# Altium PCB PCB1.PcbDoc
Units mm, origin at the board's own origin, x right, y up, seen from the top; angles counter-clockwise.
Board outline 118.49 x 70.48 mm, 2 copper layers (Top Layer, Bottom Layer); 58 components, 45 nets, 185 pads, 12 vias.
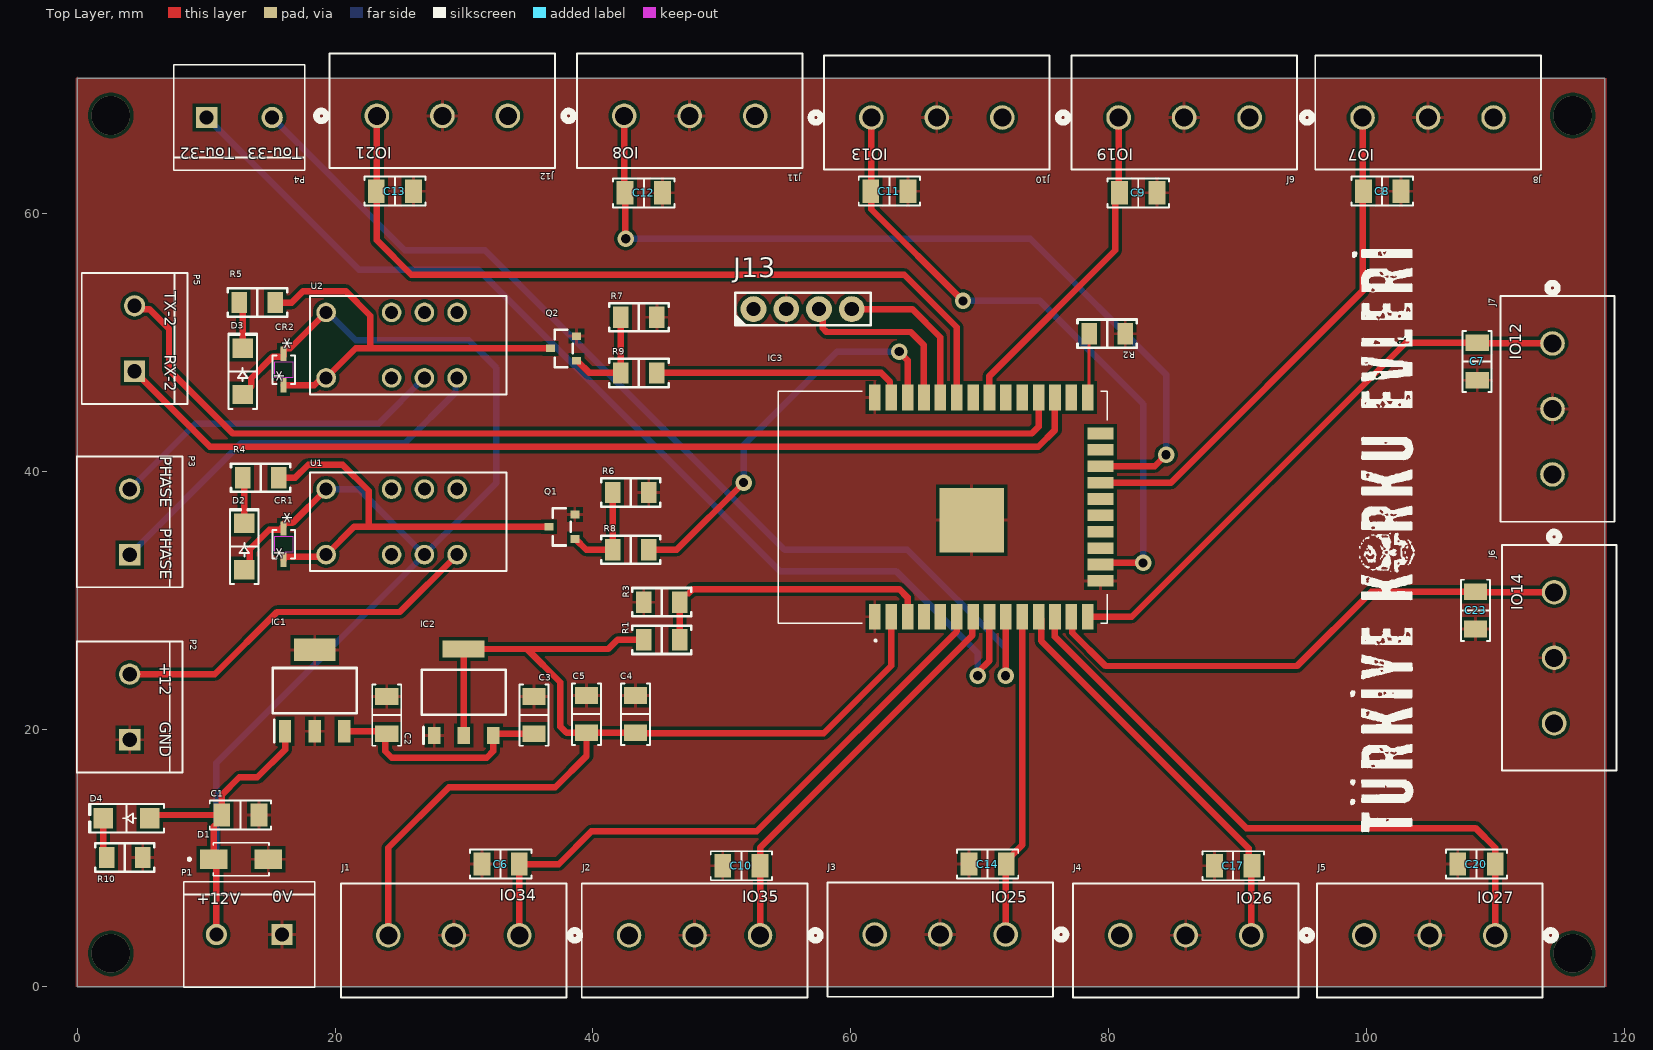
[diagram p0: Top Layer view]
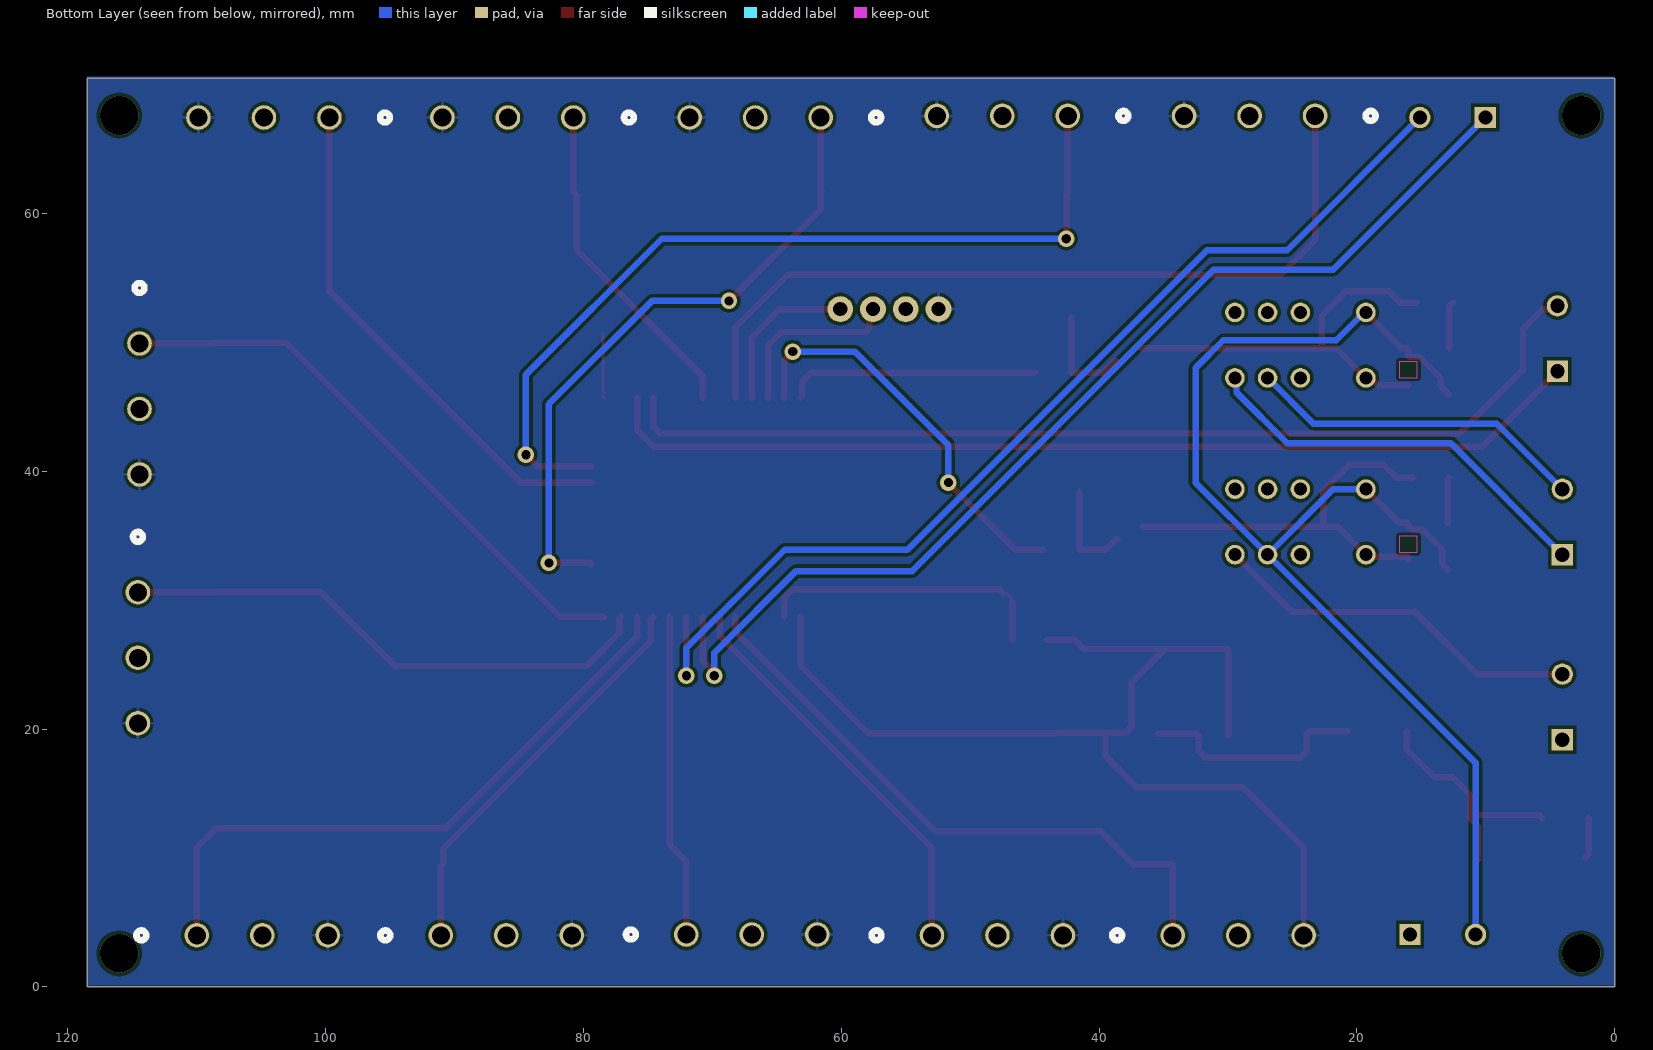
[diagram p1: Bottom Layer view, seen from below]
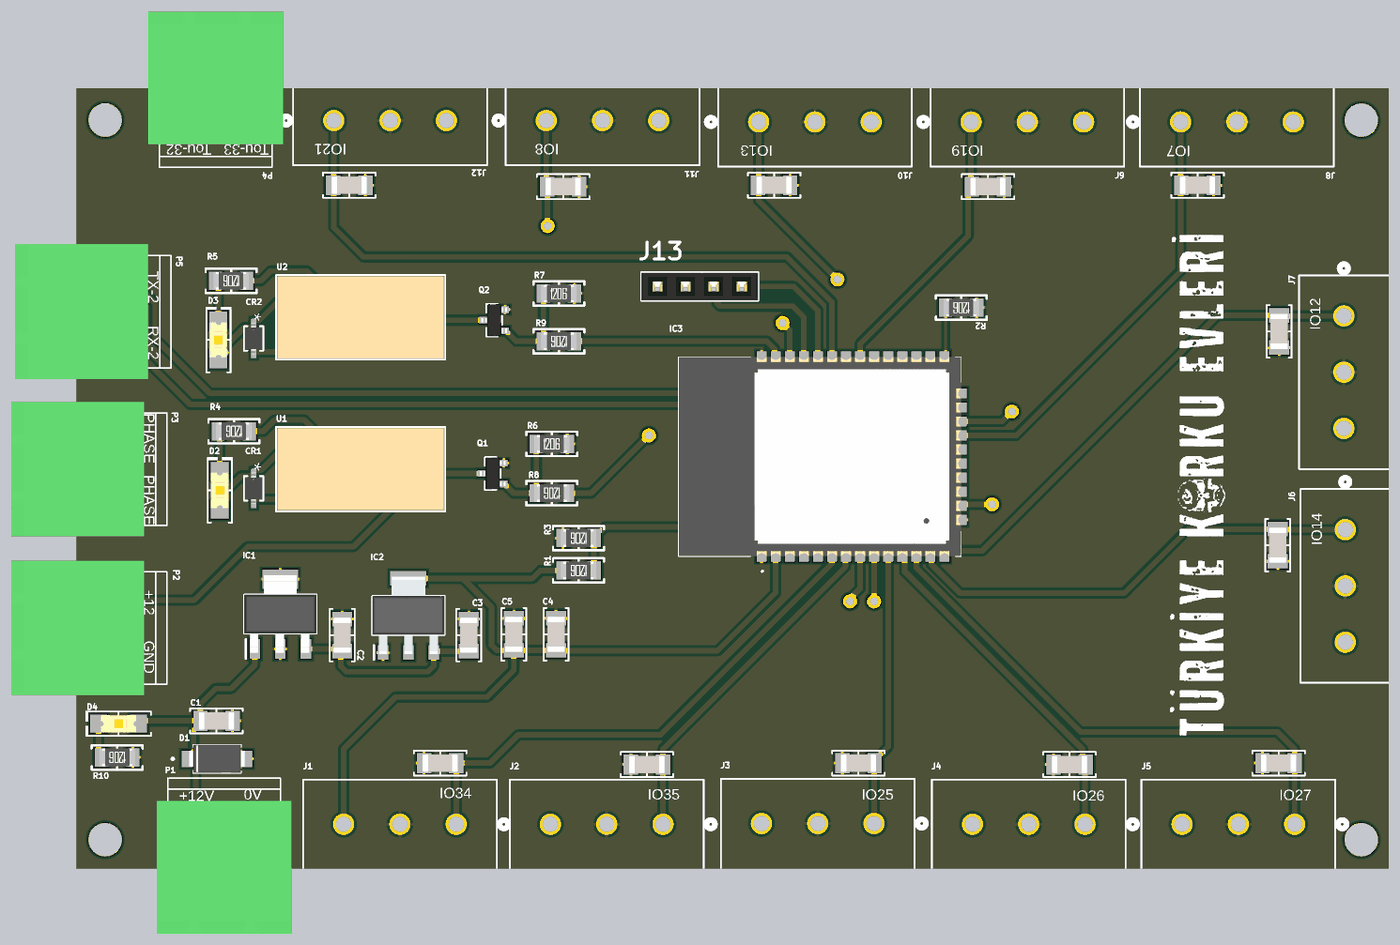
[diagram p2: 3D render of the assembled board from above, using the file's embedded part models]

## Layer stack, top to bottom
Top Solder: solder mask 0.0102, Solder Resist, Dk 3.5
Top Layer: signal copper 0.0356
Dielectric 1: dielectric 0.32, FR-4, Dk 4.8
Bottom Layer: signal copper 0.0356
Bottom Solder: solder mask 0.0102, Solder Resist, Dk 3.5

## Board outline
0,0 118.491,0 118.491,70.485 0,70.485

## Design rules (kind name [scope] priority, off if disabled: settings)
Clearance [All] p1: gap=0.254 ignorepadtopadclearanceinfootprint=FALSE except(0: Arc-Hole Track-Hole SMDPad-Hole THPad-Hole Via-Hole Fill-Hole Poly-Hole Region-Hole Text-Hole)
PolygonConnect [All] p1: connectstyle=Relief reliefconductorwidth=0.254 reliefentries=4 polygonreliefangle="90 Angle" airgapwidth=0.254
RoutingVias [All] p1: holewidth=0.711 width=1.27 viastyle="Through Hole" minholewidth=0.711 minwidth=1.27 maxholewidth=0.711 maxwidth=1.27
SolderMaskExpansion [All] p1: expansion=0.102 istentingtop=FALSE
Width [All] p1: maxlimit=0.254 minlimit=0.254 preferedwidth=0.254
30 further rules are at their usual default settings.

## Classes and differential pairs
component class relay: CR1 CR2 D2 D3 P2 P3 Q1 Q2 R4 R5 R6 R7 R8 R9 U1 U2
component class power: C1 C2 C3 D1 D4 IC1 IC2 P1 R10
component class microprocessor: C4 C5 IC3 J13 R1 R2 R3
component class connector: C6 C7 C8 C9 C10 C11 C12 C13 C14 C17 C20 C23 J1 J2 J3 J4 J5 J6 J7 J8 J9 J10 J11 J12 P4 P5

## Components (designator, comment, footprint, x,y, rotation, side; value= is the part's Value field where it differs from the comment)
C1 "100nF" "CAP 1206_3216 - 0.8MM" 12.647,13.335 r0 top value=1000pF
C2 "100nF" "CAP 1206_3216 - 0.8MM" 24.003,21.082 r270 top value=1000pF
C3 "100nF" "CAP 1206_3216 - 0.8MM" 35.433,21.082 r270 top value=1000pF
C4 "10uf" "CAP 1206_3216 - 0.8MM" 43.307,21.156 r270 top value=1000pF
C5 "100nf" "CAP 1206_3216 - 0.8MM" 39.497,21.156 r270 top value=1000pF
C6 "100nf" "CAP 1206_3216 - 0.8MM" 32.84,9.525 r0 top value=1000pF
C7 "100nf" "CAP 1206_3216 - 0.8MM" 108.585,48.514 r90 top value=1000pF
C8 "100nf" "CAP 1206_3216 - 0.8MM" 101.219,61.722 r180 top value=1000pF
C9 "100nf" "CAP 1206_3216 - 0.8MM" 82.296,61.595 r180 top value=1000pF
C10 "100nf" "CAP 1206_3216 - 0.8MM" 51.509,9.398 r0 top value=1000pF
C11 "100nf" "CAP 1206_3216 - 0.8MM" 62.992,61.722 r180 top value=1000pF
C12 "100nf" "CAP 1206_3216 - 0.8MM" 43.942,61.595 r180 top value=1000pF
C13 "100nf" "CAP 1206_3216 - 0.8MM" 24.638,61.722 r180 top value=1000pF
C14 "100nf" "CAP 1206_3216 - 0.8MM" 70.612,9.525 r0 top value=1000pF
C17 "100nf" "CAP 1206_3216 - 0.8MM" 89.662,9.398 r0 top value=1000pF
C20 "100nf" "CAP 1206_3216 - 0.8MM" 108.532,9.525 r0 top value=1000pF
C23 "100nf" "CAP 1206_3216 - 0.8MM" 108.458,29.21 r90 top value=1000pF
CR1 "1N4148WS-E3-08" CR_WS-E3-08_VIS 16.002,34.341 r270 top
CR2 "1N4148WS-E3-08" CR_WS-E3-08_VIS 16.002,47.879 r270 top
D1 "SS120" DIOM4325X250N 12.7,9.906 r0 top
D2 "1206" "LED 1206_3216 YELLOW" 12.954,34.163 r90 top value=Yellow
D3 "1206" "LED 1206_3216 YELLOW" 12.827,47.752 r90 top value=Yellow
D4 "1206" "LED 1206_3216 YELLOW" 3.81,13.081 r180 top value=Yellow
IC1 "LM7805MPX_NOPB" SOT230P700X180-4N 18.415,22.987 r90 top
IC2 "AMS1117-3.3" SOT229P700X180-4N 29.972,22.86 r90 top
IC3 "ESP-WROOM-32D" ESPWROOM32D 67.125,37.211 r90 top
J1 "1924318" CONN_1924318 24.13,4 r180 top
J2 "1924318" CONN_1924318 42.799,4 r180 top
J3 "1924318" CONN_1924318 61.849,4.064 r180 top
J4 "1924318" CONN_1924318 80.899,4 r180 top
J5 "1924318" CONN_1924318 99.822,4 r180 top
J6 "1924318" CONN_1924318 114.554,20.447 r270 top
J7 "1924318" CONN_1924318 114.427,39.751 r270 top
J8 "1924318" CONN_1924318 109.855,67.437 r0 top
J9 "1924318" CONN_1924318 90.932,67.437 r0 top
J10 "1924318" CONN_1924318 71.755,67.437 r0 top
J11 "1924318" CONN_1924318 52.578,67.564 r0 top
J12 "1924318" CONN_1924318 33.401,67.564 r0 top
J13 "M20-7820442" "HARWIN M20-7820445" 56.261,52.578 r90 top
P1 "282837-2" TE_282837-2 13.335,4.064 r180 top
P2 "282837-2" TE_282837-2 4.064,21.717 r90 top
P3 "282837-2" TE_282837-2 4.064,36.068 r90 top
P4 "282837-2" TE_282837-2 12.573,67.437 r0 top
P5 "282837-2" TE_282837-2 4.445,50.292 r90 top
Q1 "BC817-25,215" "NEXPERIA SOT-23-3" 37.592,35.687 r180 top
Q2 "BC817-25,215" "NEXPERIA SOT-23-3" 37.719,49.53 r180 top
R1 "4.7K" "RES 1206_3216" 45.336,26.924 r180 top value="61.9 kOhms"
R2 "4.7K" "RES 1206_3216" 79.883,50.673 r180 top value="61.9 kOhms"
R3 "4.7K" "RES 1206_3216" 45.336,29.845 r180 top value="61.9 kOhms"
R4 "4.7K" "RES 1206_3216" 14.224,39.497 r180 top value="61.9 kOhms"
R5 "4.7K" "RES 1206_3216" 13.97,53.086 r180 top value="61.9 kOhms"
R6 "10K" "RES 1206_3216" 42.926,38.354 r0 top value="61.9 kOhms"
R7 "10K" "RES 1206_3216" 43.564,51.943 r0 top value="61.9 kOhms"
R8 "4.7K" "RES 1206_3216" 42.926,33.909 r180 top value="61.9 kOhms"
R9 "4.7K" "RES 1206_3216" 43.564,47.625 r180 top value="61.9 kOhms"
R10 "4.7K" "RES 1206_3216" 3.683,10.033 r180 top value="61.9 kOhms"
U1 "TX2-L-12V" RELAY_TX2_PAN 19.304,33.528 r90 top
U2 "TX2-L-12V" RELAY_TX2_PAN 19.304,47.244 r90 top

## Footprints (in the part's own frame and the unit in brackets; to place one, negate y for a bottom-side part, rotate by r counter-clockwise, add the part's x,y. Pads: shape width x height; smd on the part's side, far side on the other; paste and mask are expansions set on the pad)
"CAP 1206_3216 - 0.8MM" [mm] "Chip Capacitor, 2-Leads, Body 3.25x1.60mm, IPC Medium Density"
  rect 1.3x1.8 smd: 1(-1.45,0) 2(1.45,0)
  silkscreen extent -2.37,-1.12 2.37,1.12, body extent -1.6,-0.8 1.6,0.8, height 0.8
CONN_1924318 [mil]
  round 75 / inner round 60 / far side round 75 hole 55 paste-37.5 mask+0: 1(-400,0) 2(-200,0) 3(0,0)
  silkscreen extent -584,-159 145,190, body extent -540,-85 139,387, height 336
CR_WS-E3-08_VIS [mil]
  rect 44x18 smd paste+0 mask+0: 1(-48,0) 2(48,0)
  Keep-Out Layer region: -24,-27.5 -24,27.5 24,27.5 24,-27.5
  silkscreen extent -44,-35 44,35, body extent -56,-29 56,29, height 45
DIOM4325X250N [mm]
  rect 2.12x1.5 smd: A(2.115,0) C(-2.115,0)
  silkscreen extent -4.1,-1.28 2.16,1.28, body extent -2.57,-1.28 2.57,1.28, height 2.5
ESPWROOM32D [mm]
  rect 2x0.9 smd: 1(-8.5,5.26) 2(-8.5,3.99) 3(-8.5,2.72) 4(-8.5,1.45) 5(-8.5,0.18) 6(-8.5,-1.09) 7(-8.5,-2.36) 8(-8.5,-3.63) 9(-8.5,-4.9) 10(-8.5,-6.17) 11(-8.5,-7.44) 12(-8.5,-8.71) 13(-8.5,-9.98) 14(-8.5,-11.25) 25(8.5,-11.25) 26(8.5,-9.98) 27(8.5,-8.71) 28(8.5,-7.44) 29(8.5,-6.17) 30(8.5,-4.9) 31(8.5,-3.63) 32(8.5,-2.36) 33(8.5,-1.09) 34(8.5,0.18) 35(8.5,1.45) 36(8.5,2.72) 37(8.5,3.99) 38(8.5,5.26)
  rect 0.9x2 smd: 15(-5.715,-12.25) 16(-4.445,-12.25) 17(-3.175,-12.25) 18(-1.905,-12.25) 19(-0.635,-12.25) 20(0.635,-12.25) 21(1.905,-12.25) 22(3.175,-12.25) 23(4.445,-12.25) 24(5.715,-12.25)
  rect 5x5 smd: 39(-1,-2.24)
  silkscreen extent -10.4,-12.75 9,12.75, body extent -9,-12.75 9,12.75, height 3.1
"HARWIN M20-7820445" [mm] "2.54mm DIL PC TAIL PIN HEADER ASSEMBLY"
  round 2 hole 1.1: 1(0,3.81) 2(0,1.27) 3(0,-1.27) 4(0,-3.81)
  silkscreen extent -1.27,-5.3 1.27,5.27, body extent -1.25,-5.28 1.25,5.28, height 8.5
"LED 1206_3216 YELLOW" [mm] "Chip Diode, 2-Leads, Body 3.13x1.55mm, IPC Medium Density"
  rect 1.5x1.6 smd: 1(-1.8,0) 2(1.8,0)
  silkscreen extent -2.92,-1.1 2.92,1.1, body extent -1.6,-0.8 1.6,0.8, height 0.9
"NEXPERIA SOT-23-3" [mm] "SOT23, 3-Leads, Body 2.90x2.40mm, Pitch 0.95mm, IPC Medium Density"
  rect 0.7x0.6 smd: 1(-1,0.95) 2(-1,-0.95) 3(1,0)
  silkscreen extent -0.7,-1.45 0.7,1.45, body extent -1.16,-1.45 1.16,1.45, height 1.5
RELAY_TX2_PAN [mil]
  round 60 hole 40 paste-30 mask+0: 1(0,0) 3(0,-200) 4(0,-300) 5(0,-400) 8(200,-400) 9(200,-300) 10(200,-200) 12(200,0)
  silkscreen extent -50,-551 251,50, body extent -46,-546 246,45, height 323
"RES 1206_3216" [mm] "Chip Resistor, 2-Leads, Body 3.13x1.55mm, IPC Medium Density"
  rect 1.2x1.65 smd: 1(-1.4,0) 2(1.4,0)
  silkscreen extent -2.3,-1.1 2.3,1.1, body extent -1.6,-0.8 1.6,0.8, height 0.6
SOT229P700X180-4N [mm]
  rect 1.3x0.95 smd: 1(-3.35,2.29) 2(-3.35,0) 3(-3.35,-2.29)
  rect 1.3x3.25 smd: 4(3.35,0)
  silkscreen extent -4,-3.25 1.75,3.25, body extent -3.5,-3.25 3.5,3.25, height 1.8
SOT230P700X180-4N [mm]
  rect 1.75x0.95 smd: 1(-3.15,2.3) 2(-3.15,0) 3(-3.15,-2.3)
  rect 1.75x3.2 smd: 4(3.15,0)
  silkscreen extent -4.03,-3.25 1.75,3.25, body extent -3.5,-3.25 3.5,3.25, height 1.68
TE_282837-2 [mm]
  rect 1.65x1.65 / inner round 1.65 / far side rect 1.65x1.65 hole 1.1: 1(-2.54,0)
  round 1.65 hole 1.1: 2(2.54,0)
  silkscreen extent -5.08,-4.1 5.08,4.1, body extent -6.08,-2.03 6.08,9.97, height 8.45

## Part data
C1 C2 C3 C4 C5 C6 C7 C8 C9 C10 C11 C12 C13 C14 C17 C20 C23: library part MM062C102KCZ2A, "CAP CER 1000PF 200V X7R 1206", Capacitance=1000pF, Device Package="1206 (3216 Metric)", manufacturer="AVX Corporation", Operating Temperature="-55°C ~ 125°C", Supplier Part Number 1=478-10625-1-ND, Temperature Coefficient=X7R, Tolerance=±10%, Voltage - Rated=200V, Applications="Medical, Non-Critical", componentlink1description=Datasheet, componentlink1url=http://datasheets.avx.com/AVX-MM.pdf, componentlink2description="DigiKey Link", componentlink2url=http://digikey.com/product-detail/en/avx-corporation/MM062C102KCZ2A/478-10625-1-ND/7344886, lastupdated="2.09.2020 01:04:46", Lifecycle Status=Active, Minimum Order=1, Mounting Type="Surface Mount, MLCC", Package / Case="1206 (3216 Metric)", packaging=TapeAndReel, Part Number=MM062C102KCZ2A, Part Status=Active, partid=18686, price=0.57, series=MM, Size / Dimension="0.126\" L x 0.063\" W (3.20mm x 1.60mm)", Supplier 1=DigiKey, Thickness (Max)="0.029\" (0.74mm)"
CR1 CR2: "No Description Available", Mfr_Name=Vishay
D1: "1A, 200V, Schottky Rectifier", Package="SMA-2 Taiwan Semiconductor", Availability="In Stock", Check_prices=https://www.snapeda.com/parts/SS120/Taiwan+Semiconductor/view-part/?ref=eda, MF="Taiwan Semiconductor", MP=SS120, price=None, SnapEDA_Link=https://www.snapeda.com/parts/SS120/Taiwan+Semiconductor/view-part/?ref=snap
D2 D3 D4: library part 25-21UYC/S530-A2/TR8, "LED YELLOW CLEAR 2SMD", Color=Yellow, Current - Test=20mA, Device Package="1206 (3216 Metric)", Lens Color=Colorless, manufacturer="Everlight Electronics Co Ltd", Millicandela Rating=45mcd, Supplier Device Package=2-SMD, Supplier Part Number 1=1080-1595-1-ND, Voltage - Forward (Vf) (Typ)=2V, componentlink1description=Datasheet, componentlink1url=//media.digikey.com/pdf/Data%20Sheets/Everlight%20PDFs/25-21UYC-S530-A2-TR8_V6_11-12-18.pdf, componentlink2description="DigiKey Link", componentlink2url=https://www.digikey.com/en/products/detail/everlight-electronics-co-ltd/25-21UYC-S530-A2-TR8/8535289, Configuration=Standard, Height (Max)=1.20mm, lastupdated="3.06.2024 20:01:38", Lens Size="1.10mm Dia", Lens Style="Round with Domed Top", Lens Transparency=Clear, Lifecycle Status=Active, Minimum Order=1, Mounting Type="Surface Mount", Package / Case="1206 (3216 Metric)", packaging=TapeAndReel, Part Number=25-21UYC/S530-A2/TR8, Part Status=Active, partid=2, price=0.08, series=-, Size / Dimension="3.20mm L x 1.60mm W", Supplier 1=DigiKey, Viewing Angle=60°, Wavelength - Dominant=589nm, Wavelength - Peak=591nm
IC1: "Integrated Circuit", Arrow Part Number=LM7805MPX/NOPB, Manufacturer_Name="Texas Instruments", Mouser Part Number=595-LM7805MPX/NOPB, Arrow Price/Stock=https://www.arrow.com/en/products/lm7805mpxnopb/texas-instruments?utm_currency=USD&region=nac, Datasheet Link=https://www.arrow.com/en/products/lm7805mpxnopb/texas-instruments, Height=1.8mm, Manufacturer_Part_Number=LM7805MPX/NOPB, Mouser Price/Stock=https://www.mouser.co.uk/ProductDetail/Texas-Instruments/LM7805MPX-NOPB?qs=gO6GG99qvRCSwIVAoVKHPw%3D%3D
IC2: "Integrated Circuit", Manufacturer_Name=Advanced, Datasheet Link=https://datasheet.datasheetarchive.com/originals/distributors/Datasheets-28/DSA-550594.pdf, Height=1.8mm, Manufacturer_Part_Number=AMS1117-3.3
IC3: "Integrated Circuit", Manufacturer_Name="Espressif Systems", Mouser Part Number=356-ESP-WROOM-32D, Datasheet Link=https://componentsearchengine.com/Datasheets/1/ESP-WROOM-32D.pdf, Height=3.2mm, Manufacturer_Part_Number=ESP-WROOM-32D, Mouser Price/Stock=https://www.mouser.co.uk/ProductDetail/Espressif-Systems/ESP-WROOM-32D?qs=MLItCLRbWsyWVKgdQMcFuQ%3D%3D
J1 J2 J3 J4 J5 J6 J7 J8 J9 J10 J11 J12: "No Description Available", Mfr_Name="Phoenix Contact", RefDes=RefDes, Type=Type
J13: "CONN RCPT 4POS 0.1 GOLD PCB", Current Rating (Amps)=3A, manufacturer="Harwin Inc.", Material Flammability Rating="UL94 V-0", Operating Temperature="-40°C ~ 105°C", Supplier Part Number 1=952-1791-ND, Insulation Color=Black, componentlink1description=Datasheet, componentlink1url=https://cdn.harwin.com/pdfs/Harwin_PC_Connectors_M20.pdf, componentlink2description="DigiKey Link", componentlink2url=https://www.digikey.com/en/products/detail/harwin-inc/M20-7820442/3727760, Connector Type=Receptacle, Contact Finish - Mating=Gold, Contact Finish - Post=Tin, Contact Finish Thickness - Mating=Flash, Contact Length - Post="0.118\" (3.00mm)", Contact Type="Female Socket", Fastening Type=Push-Pull, lastupdated="21.09.2022 18:57:11", Lifecycle Status=Active, Mated Stacking Heights="11.04mm, 12.63mm", Minimum Order=1, Mounting Type="Through Hole", Number of Positions=4, Number of Positions Loaded=All, Number of Rows=1, packaging=Tube, Part Number=M20-7820442, Part Status=Active, Pitch - Mating="0.100\" (2.54mm)", price=0.45, series=M20, Style="Board to Board or Cable", Supplier 1=DigiKey, Termination=Solder, Insulation Height="0.335\" (8.51mm)"
P1 P2 P3 P4 P5: "Ð Ð°Ð·ÑŠÐµÐ¼Ð½Ñ‹Ðµ ÐºÐ»ÐµÐ¼Ð¼Ð½Ñ‹Ðµ ÐºÐ¾Ð»Ð¾Ð´ÐºÐ¸ Ð Ð¾Ð·ÐµÑ‚ÐºÐ° 2 Ð¿Ð¾Ð»Ð¾Ð¶ÐµÐ½Ð¸Ñ 5,08 Ð¼Ð¼ ÐŸÑ€Ð¸Ð¿Ð¾Ð¹ Ð¿Ñ€ÑÐ¼Ð¾Ð¹ Ñ‡ÐµÑ€ÐµÐ· Ð¾Ñ‚Ð²ÐµÑ€ÑÑ‚Ð¸Ðµ 13,5 Ð / ÐºÐ¾Ð½Ñ‚Ð°ÐºÑ‚", Package=None, Availability="In Stock", Check_prices=https://www.snapeda.com/parts/282837-2/TE+Connectivity+AMP+Connectors/view-part/?ref=eda, MF="TE Connectivity", MP=282837-2, price=None, Purchase-URL=https://pricing.snapeda.com/search/part/282837-2/?ref=eda, SnapEDA_Link=https://www.snapeda.com/parts/282837-2/TE+Connectivity+AMP+Connectors/view-part/?ref=snap
Q1 Q2: "TRANS NPN 45V 0.5A TO236AB", Current - Collector (Ic) (Max)="500 mA", Current - Collector Cutoff (Max)="100nA (ICBO)", DC Current Gain (hFE) (Min) @ Ic, Vce="160 @ 100mA, 1V", Frequency - Transition=100MHz, manufacturer="Nexperia USA Inc.", Operating Temperature="150°C (TJ)", Package / Case="TO-236-3, SC-59, SOT-23-3", Power - Max="250 mW", Supplier Device Package=TO-236AB, Supplier Part Number 1=1727-2918-1-ND, Voltage - Collector Emitter Breakdown (Max)="45 V", componentlink1description=Datasheet, componentlink1url=https://assets.nexperia.com/documents/data-sheet/BC817_SER.pdf, componentlink2description="DigiKey Link", componentlink2url=https://www.digikey.com/en/products/detail/nexperia-usa-inc/BC817-25-215/763234, lastupdated="3.06.2024 20:24:20", Lifecycle Status=Active, Minimum Order=1, Mounting Type="Surface Mount", packaging=TapeAndReel, Part Number=BC817-25,215, Part Status=Active, partid=319, price=0.02, series=-, Supplier 1=DigiKey, Transistor Type=NPN, Vce Saturation (Max) @ Ib, Ic="700mV @ 50mA, 500mA"
R1 R2 R3 R4 R5 R6 R7 R8 R9 R10: library part CRCW120661K9FKEA, "RES SMD 61.9K OHM 1% 1/4W 1206", Device Package="1206 (3216 Metric)", manufacturer="Vishay Dale", Operating Temperature="-55°C ~ 155°C", Power (Watts)="0.25W, 1/4W", Ratings=AEC-Q200, Resistance="61.9 kOhms", Supplier Device Package=1206, Supplier Part Number 1=541-61.9KFCT-ND, Temperature Coefficient=±100ppm/°C, Tolerance=±1%, componentlink1description=Datasheet, componentlink1url=http://www.vishay.com/docs/20035/dcrcwe3.pdf, componentlink2description="DigiKey Link", componentlink2url=https://www.digikey.com/en/products/detail/vishay-dale/CRCW120661K9FKEA/1176848, Composition="Thick Film", Features="Automotive AEC-Q200", Height - Seated (Max)="0.024\" (0.60mm)", lastupdated="9.02.2024 20:54:45", Lifecycle Status=Active, Minimum Order=1, Number of Terminations=2, Package / Case="1206 (3216 Metric)", packaging=TapeAndReel, Part Number=CRCW120661K9FKEA, Part Status=Active, partid=26923, price=0.01, series=CRCW, Size / Dimension="0.126\" L x 0.063\" W (3.20mm x 1.60mm)", Supplier 1=DigiKey
U1 U2: "No Description Available", Mfr_Name=Panasonic, Digi-Key_Part_Number_1=TX2-L-12V-ND, RefDes=RefDes, Type=Type

## Via types
v1: diameter 1.27, hole 0.711, Top Layer to Bottom Layer, 8 vias
v2: diameter 3, hole 3, Top Layer to Bottom Layer, 4 vias

## Nets (pads, with @x,y where several pads share a name; then routed paths per layer and width w, separated by ;. In a path a pad name is that pad's centre, name@x,y a point inside that pad or via, vN(x,y) a via of type N, cw(c..) or ccw(c..) an arc to the next point about the centre after c; other vN are vias at no path point)
3.3V: C4.2 C5.2 IC2.2 IC2.4 IC3.2 J1.3 J2.3 J3.3 J4.3 J5.3 J6.3 J7.3 J8.3 J9.3 J10.3 J11.3 J12.3 J13.1 R1.2 | length 86.8
  Top Layer w0.254: C5.2@39.247,19.706 C5.2 ; C4.2 C4.2@43.331,19.682 ; 57.909,19.682 57.933,19.706
  Top Layer w0.5: J1.3 24.13,10.795 28.829,15.494 37.084,15.494 39.497,17.907 C5.2 C4.2@43.18,19.706 ; IC2.2 IC2.4 34.877,26.21 ; C5.2@39.247,19.706 37.952,19.706 37.465,20.193 37.465,23.622 34.877,26.21 ; C4.2@43.331,19.682 57.909,19.682 ; R1.2@44.066,26.924 41.91,26.924 41.196,26.21 34.877,26.21 ; 57.933,19.706 63.135,24.908 IC3.2
5V: C2.2 C3.2 IC1.3 IC2.3 | length 17.8
  Top Layer w0.5: IC1.3 23.671,19.837 23.876,19.632 23.876,18.288 24.384,17.78 31.75,17.78 32.262,18.292 IC2.3 32.384,19.632 C3.2
+12: C1.1 CR1.1 CR2.1 D1.C D2.1 D3.1 D4.1 IC1.1 P1.2 U1.4 U1.12 U2.12 | length 121.8
  Top Layer w0.5: D4.1 5.864,13.335 C1.1 ; P1.2 10.795,9.696 D1.C 10.585,12.473 11.197,13.085 C1.1 ; D3.1 12.877,45.952 13.5,46.575 13.5,47.224 15.146,48.87 15.9,48.87 16.002,48.971 CR2.1 16.002,49.428 16.104,49.53 16.51,49.53 U2.12 ; D2.1 13.371,32.78 13.371,33.945 14.88,35.454 15.709,35.454 16.002,35.747 16.002,35.89 16.104,35.992 16.688,35.992 U1.12 ; IC1.1 16.115,18.401 13.97,16.256 12.573,16.256 11.197,14.88 C1.1
  Bottom Layer w0.254: U2.12 U2.12@19.431,52.324
  Bottom Layer w0.5: P1.2 10.795,17.399 U1.4 ; U1.12 21.844,38.608 U1.4 ; U2.12@19.431,52.324 21.59,50.165 30.353,50.165 32.512,48.006 32.512,39.116 U1.4
GND: C1.2 C2.1 C3.1 C4.1 C5.1 C6.1 C7.1 C8.1 C9.1 C10.1 C11.1 C12.1 C13.1 C14.1 C17.1 C20.1 C23.1 D1.A IC1.2 IC1.4 IC2.1 IC3.1 IC3.15 IC3.38 IC3.39 J1.2 J2.2 J3.2 J4.2 J5.2 J6.2 J7.2 J8.2 J9.2 J10.2 J11.2 J12.2 J13.2 P1.1 P2.1 Q1.2 Q2.2 R2.1 R3.2 R6.2 R7.2 R10.1
IO2: IC3.24
IO4: IC3.26
IO5: IC3.29
IO6: IC3.20
IO7: C8.2 IC3.21 J8.1 | length 39.9
  Top Layer w0.5: IC3.21 84.836,39.116 99.695,53.975 99.695,61.796 J8.1
IO8: C12.2 IC3.22 J11.1 | length 67.5
  Top Layer w0.5: J11.1 42.418,61.669 C12.2 42.519,61.569 42.519,58.065 v1(42.545,58.039) ; IC3.22 83.566,40.386 v1(84.455,41.275)
  Bottom Layer w0.5: v1(42.545,58.039) 73.914,58.039 84.455,47.498 v1(84.455,41.275)
IO9: IC3.17
IO10: IC3.18
IO11: IC3.19
IO12: C7.2 IC3.14 J7.1 | length 44.9
  Top Layer w0.254: C7.2 C7.2@108.638,49.911
  Top Layer w0.5: IC3.14 81.797,28.711 103.05,49.964 C7.2 ; C7.2@108.638,49.911 J7.1
IO13: C11.2 IC3.16 J10.1 | length 50.2
  Top Layer w0.5: J10.1 61.595,61.775 C11.2 61.595,61.669 61.595,60.325 v1(68.707,53.213) ; IC3.16 79.502,32.893 v1(82.677,32.893)
  Bottom Layer w0.5: v1(68.707,53.213) 74.676,53.213 82.677,45.212 v1(82.677,32.893)
IO14: C23.2 IC3.13 J6.1 | length 42.1
  Top Layer w0.254: C23.2 C23.2@108.511,30.607
  Top Layer w0.5: IC3.13 77.173,28.643 77.173,27.475 79.756,24.892 94.615,24.892 100.383,30.66 105.791,30.66 C23.2 ; C23.2@108.511,30.607 J6.1
IO15: IC3.23
IO18: IC3.30
IO19: C9.2 IC3.31 J9.1 | length 25.9
  Top Layer w0.5: IC3.31 70.755,47.387 80.518,57.15 80.518,61.415 80.772,61.669 J9.1
IO21: C13.2 IC3.33 J12.1 | length 62.9
  Top Layer w0.5: J12.1 23.241,61.775 C13.2 23.241,61.669 23.241,57.912 25.908,55.245 64.135,55.245 68.215,51.165 IC3.33
IO22: IC3.36 R8.1 | length 31.3
  Top Layer w0.5: R8.1 46.482,33.909 v1(51.689,39.116) ; v1(63.754,49.276) 63.754,49.249 64.405,48.598 IC3.36
  Bottom Layer w0.5: v1(51.689,39.116) 51.689,42.037 58.928,49.276 v1(63.754,49.276)
IO23: IC3.37 R9.1 | length 19.6
  Top Layer w0.5: R9.1 62.357,47.625 63.039,46.943 63.039,45.807 IC3.37
IO25: C14.2 IC3.10 J3.1 | length 25.2
  Top Layer w0.5: J3.1 72.009,9.472 72.009,9.722 73.295,11.008 IC3.10
IO26: C17.2 IC3.11 J4.1 | length 31.5
  Top Layer w0.5: IC3.11 74.765,28.511 74.765,26.835 90.852,10.748 90.852,9.552 91.059,9.345 J4.1
IO27: C20.2 IC3.12 J5.1 | length 49.3
  Top Layer w0.5: IC3.12 75.835,27.162 90.678,12.319 108.458,12.319 109.982,10.795 C20.2 J5.1
IO32: IC3.8 P4.1 | length 83.8
  Top Layer w0.5: v1(69.85,24.13) 69.85,24.405 70.755,25.31 IC3.8
  Bottom Layer w0.5: P4.1 21.844,55.626 31.115,55.626 54.483,32.258 63.5,32.258 69.85,25.908 v1(69.85,24.13)
IO33: IC3.9 P4.2 | length 80.7
  Top Layer w0.5: v1(72.009,24.13) 72.009,28.695 IC3.9
  Bottom Layer w0.5: P4.2 25.4,57.15 31.623,57.15 54.864,33.909 64.389,33.909 72.009,26.289 v1(72.009,24.13)
IO34: C6.2 IC3.6 J1.1 | length 48.1
  Top Layer w0.5: J1.1 C6.2 37.338,9.525 39.878,12.065 52.705,12.065 68.215,27.575 IC3.6
IO35: C10.2 IC3.7 J2.1 | length 31.6
  Top Layer w0.5: J2.1 52.959,10.795 69.425,27.261 69.425,28.651 IC3.7
NetCR1_2: CR1.2 Q1.3 R4.1 U1.1 | length 32.8
  Top Layer w0.5: R4.1 16.891,39.497 17.907,40.513 20.574,40.513 22.606,38.481 22.606,35.687 ; CR1.2 16.002,33.249 16.104,33.35 19.126,33.35 U1.1 21.463,35.687 22.606,35.687 ; Q1.3 22.606,35.687
NetCR2_2: CR2.2 Q2.3 R5.1 U2.1 | length 33
  Top Layer w0.5: R5.1 16.637,53.086 17.526,53.975 20.828,53.975 22.733,52.07 22.733,49.53 ; CR2.2 18.376,46.66 18.96,47.244 U2.1 21.59,49.53 22.733,49.53 ; Q2.3 22.733,49.53
NetD2_2: D2.2 R4.2 | length 3.6
  Top Layer w0.5: R4.2 12.954,39.367 D2.2
NetD3_2: D3.2 R5.2 | length 3.6
  Top Layer w0.5: R5.2 12.827,52.829 D3.2
NetD4_2: D4.2 R10.2 | length 3.2
  Top Layer w0.5: D4.2 2.01,10.306 R10.2
NetP2_2: P2.2 U1.5 | length 29.2
  Top Layer w0.5: P2.2 10.668,24.257 15.494,29.083 25.019,29.083 U1.5
NetP3_1: P3.1 U2.5 | length 31.7
  Bottom Layer w0.5: P3.1 12.7,42.164 25.4,42.164 29.337,46.101 29.337,47.117 U2.5
NetP3_2: P3.2 U2.4 | length 26.4
  Bottom Layer w0.5: P3.2 9.144,43.688 23.368,43.688 U2.4
NetQ1_1: Q1.1 R6.1 R8.2 | length 7.7
  Top Layer w0.5: Q1.1 38.642,34.737 39.47,33.909 R8.2 R6.1
NetQ2_1: Q2.1 R7.1 R9.2 | length 8.2
  Top Layer w0.5: Q2.1 38.769,48.58 39.724,47.625 R9.2 R7.1
NetR1_1: IC3.3 R1.1 R3.1 | length 22.9
  Top Layer w0.254: R3.1 46.736,30.07 47.209,30.543 47.434,30.543
  Top Layer w0.5: R1.1 R3.1 ; 47.434,30.543 47.752,30.861 51.435,30.861 63.754,30.861 64.405,30.21 IC3.3
NetR2_2: IC3.25 R2.2 | length 5
  Top Layer w0.254: IC3.25 78.483,45.819 R2.2
RX2: IC3.27 P5.1 | length 76.9
  Top Layer w0.5: P5.1 10.287,41.91 74.549,41.91 75.835,43.196 IC3.27
RXD0: IC3.34 J13.4 | length 12.5
  Top Layer w0.5: J13.4 64.77,52.578 66.945,50.403 IC3.34
TX2: IC3.28 P5.2 | length 78.6
  Top Layer w0.5: P5.2 4.712,52.565 5.601,52.565 7.112,51.054 7.112,47.879 12.065,42.926 74.041,42.926 74.565,43.45 IC3.28
TXD0: IC3.35 J13.3 | length 14.1
  Top Layer w0.254: J13.3 J13.3@57.865,52.244
  Top Layer w0.5: J13.3@57.865,52.244 57.818,52.197 57.818,51.093 58.111,50.8 64.643,50.8 65.675,49.768 IC3.35
pads on no net: IC3.4 IC3.5 IC3.32 U1.3 U1.8 U1.9 U1.10 U2.3 U2.8 U2.9 U2.10
copper on no net:
  other v2: 2.6,2.6 116,2.6 2.6,67.6 116,67.6

## Polygon pours and split planes (outlines as drawn)
3.3V on Bottom Layer "3.3V_L02_P000" (solid, remove dead copper, pour order 0): 0,70.485 0.127,70.612 118.491,70.612 118.491,0.127 0,0.127 0,70.358 -0.127,70.485
GND on Top Layer "GND_L01_P001" (solid, remove dead copper, pour order 1): 0,70.612 0.127,70.485 118.618,70.485 118.618,0 -0.127,0 -0.127,70.485

## Silkscreen, mask and mechanical layers (free items; w line width, h text height)
Top Overlay:
  drawing of 47 lines, arcs and shapes, not listed
  text "IO21" at 24.384,65.442 h1.52 r180
  text "IO8" at 43.561,65.442 h1.52 r180
  text "Tou-32" at 12.192,65.405 h1.52 r180
  text "Tou-33" at 17.399,65.405 h1.52 r180
  text "IO13" at 62.865,65.315 h1.52 r180
  text "IO19" at 81.915,65.315 h1.52 r180
  text "IO7" at 100.584,65.278 h1.52 r180
  text "TX-2" at 6.477,53.975 h1.52 r270
  text "RX-2" at 6.477,49.022 h1.52 r270
  text "IO12" at 112.305,48.641 h1.52 r90
  text "PHASE" at 6.113,41.148 h1.52 r270
  text "PHASE" at 6.113,35.56 h1.52 r270
  text "IO14" at 112.432,29.21 h1.52 r90
  text "+12" at 6.096,25.146 h1.52 r270
  text "GND" at 6.095,20.587 h1.52 r270
  text "IO34" at 32.766,6.367 h1.52
  text "0V" at 15.113,6.24 h1.52
  text "IO35" at 51.562,6.24 h1.52
  text "IO25" at 70.866,6.223 h1.52
  text "IO27" at 108.585,6.186 h1.52
  text "IO26" at 89.916,6.128 h1.52
  text "+12V" at 9.271,6.096 h1.52

## Text inside footprints (layer, text, board x,y; h text height)
CR1: Top Overlay "*" at 15.367,36.817 h1.27 r270; Mechanical 13 "*" at 15.367,35.382 h1.27 r270
CR2: Top Overlay "*" at 15.367,50.355 h1.27 r270; Mechanical 13 "*" at 15.367,48.92 h1.27 r270
U1: Top Overlay "*" at 16.595,33.21 h1.27 r90; Mechanical 13 "*" at 18.881,33.21 h1.27 r90
U2: Top Overlay "*" at 16.595,46.926 h1.27 r90; Mechanical 13 "*" at 18.881,46.926 h1.27 r90